# Allegro board sensor.brd
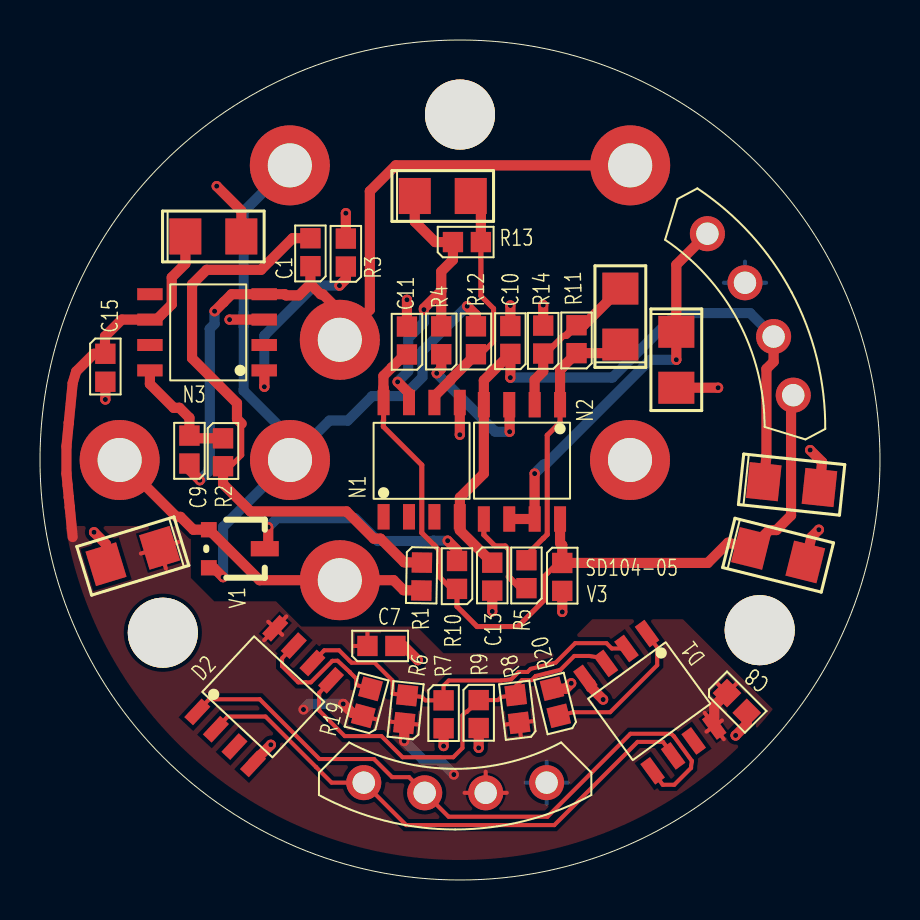
[diagram p0: board, top side]
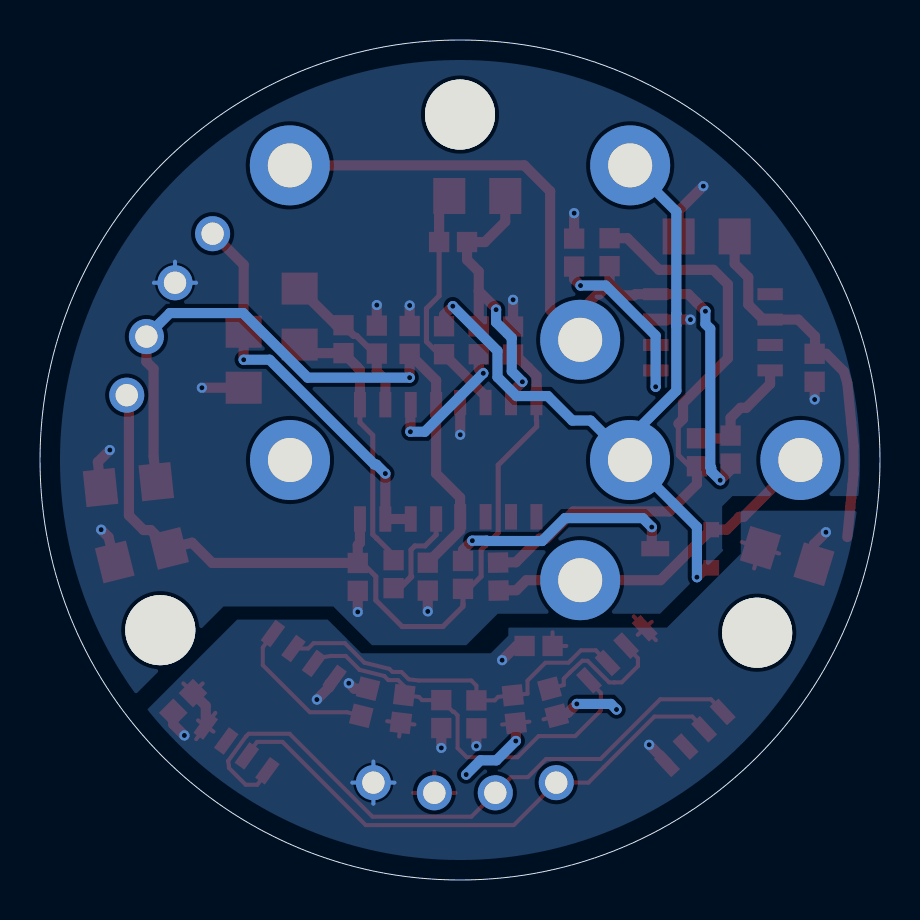
[diagram p1: board, bottom side, seen from below]

Outline 42 x 42 mm; copper layers: TOP, BOTTOM. Coordinates in mm from the lower left corner of the outline.
Outline path: circle c21,21 r21

## Placement (name value [footprint] x y rotation side)
C1  1nF  [0603]  13.52 30.69 90 top
C2  0.33uF  [C1206]  20.14 34.2 0 top
C3  10uF/25V  [C1206]  36.91 16.24 346 top
C4  10uF/25V  [C1206]  37.58 19.77 354 top
C5  0.1uF  [C1206]  29.02 28.17 90 top
C6  10uF  [C1206]  4.64 16.2 197 top
C7  0.1uF  [0603]  16.37 11.7 0 top
C8  0.1uF  [0603]  34.35 9.35 315 top
C9  10nF  [0603]  7.47 20.82 90 top
C10  0.1uF  [0603]  23.52 26.31 90 top
C11  0.1uF  [0603]  18.35 26.28 90 top
C12  0.1uF  [0603]  26.11 15.85 270 top
C13  0.1uF  [0603]  22.61 15.87 270 top
C14  10uF/25V  [C1206]  8.67 32.18 0 top
C15  0.1uF  [0603]  3.27 26.31 270 top
C16  10uF  [C1206]  31.82 26.01 270 top
D1  AT24C04  [SO8]  30.35 12.32 306 top
D2  TMP275  [SO8]  7.87 8.41 47 top
N1  OPA2277  [SO8]  17.18 18.16 90 top
N2  OPA2277  [SO8]  26 23.77 270 top
N3  LMP7721  [SO8]  11.21 25.48 180 top
NOREF  -  [unnamed]  21 38.27 0 top
NOREF#2  -  [unnamed]  35.99 12.49 0 top
NOREF#3  -  [unnamed]  6.14 12.36 0 top
R1  10k  [0603]  19.1 15.87 269 top
R2  10k  [0603]  9.15 22.09 270 top
R3  10k  [0603]  15.29 30.67 90 top
R4  10k  [0603]  20.06 26.29 90 top
R5  10k  [0603]  24.32 14.59 90 top
R6  10k  [0603]  18.21 7.85 84 top
R7  10k  [0603]  20.18 8.98 270 top
R8  10k  [0603]  23.96 7.86 97 top
R9  10k  [0603]  21.94 9 270 top
R10  1M  [0603]  20.85 14.56 90 top
R11  47k  [0603]  26.83 26.34 90 top
R12  100R  [0603]  21.8 26.29 90 top
R13  1k  [0603]  20.65 31.9 0 top
R14  4.7k  [0603]  25.16 26.32 90 top
R19  10k  [0603]  16.16 8.21 75 top
R20  10k  [0603]  25.94 8.21 104 top
TP2  7EF  [SO2_4S]  14.99 27.01 0 top
TP3  4S  [SO2_4S]  29.51 35.73 0 top
TP5  7EF  [SO2_4S]  14.99 14.99 0 top
TP6  4S  [SO2_4S]  3.98 21 0 top
TP8  7EF  [SO2_4S]  12.5 21 0 top
TP9  4S  [SO2_4S]  12.49 35.73 0 top
TP10  7EF  [SO2_4S]  29.5 21 0 top
V1  SST117  [SOT23]  8.44 17.52 270 top
X1  HEADER 4  [SIP4_CIR]  16.19 4.87 0 top
X2  HEADER 4  [SIP4_CIR]  37.66 24.24 118 top

## Library data of the parts
C1 C7-C13 C15 = 0.01uFCapacitor16V10%0402
C2-C6 C14 C16 = CT2012_0
D1 = AT24C04_1
D2 = AT24C04_2
N1 N2 = AD8072
N3 = AT24C04_3
R1-R14 R19 R20 = R1005_0
TP2 TP3 TP5 TP6 TP8-TP10 = TEST POINT_0
V1 = 2N4851_2
X1 X2 = HEADER 4

## Footprints (pads in the part's own frame, mm; a bottom-side part is the same pattern mirrored in y, then rotated)
0603
  rect 1.016x1.016 smd: 1(0,0) 2(1.397,0)
C1206
  rect 1.6x1.803 smd: 1(-1.4,0) 2(1.4,0)
SIP4_CIR
  round 1.753 hole 1.118: 1(0,0) 2(3.048,-0.508) 3(6.096,-0.508) 4(9.144,0)
SO2_4S
  round 4 hole 2.2: 1(0,0)
SO8
  rect 1.27x0.6 smd: 1(0,0) 2(0,-1.27) 3(0,-2.54) 4(0,-3.81) 5(5.715,-3.81) 6(5.715,-2.54) 7(5.715,-1.27) 8(5.715,0)
SOT23
  rect 0.762x0.787 smd: 1(0,0) 2(1.905,0)
  rect 0.762x1.397 smd: 3(0.95,2.799)
unnamed
  round 3.5 hole 3.5: (0,0)

## Nets
+3.3VD: C6.1 C7.1 C8.1 C14.1 C15.1 D1.8(VCC) D2.8(VCC) N3.6(V+) R6.1 R8.1 R19.1 X1.3
+12V: C3.1 C11.1 C12.1 N1.8(V+) N2.8(V+) R10.1 X2.1
-12V: C4.1 C10.1 C13.1 N1.4(V-) N2.4(V-) X2.2
AGND: C3.2 C4.2 C10.2 C11.2 C12.2 C13.2 C14.2 C15.2 C16.2 N1.5(IN+) N3.3(V-) R3.2 R14.2 X2.3
DGND: C6.2 C7.2 C8.2 D1.4(GND) D2.4(GND) R7.2 R9.2 R20.2 X1.4
A1: D1.2(A1) D2.6(A1) R6.2 R7.1
A2: D1.3(A2) D2.5(A2) R8.2 R9.1
CE: C1.1 C9.1 N3.4(OUT) TP2.1 TP3.1
IN+: N3.1(IN+) R3.1
IN-: C9.2 N3.8(IN-) R2.1
NC1: N3.2(NC1)
RE: R1.2 TP5.1 TP6.1 V1.1(D)
SCL: D1.6(SCL) D2.2(SCL) X1.1
SDA: D1.5(SDA) D2.1(SDA) X1.2
SO2: C16.1 N2.6(IN-) N2.7(OUT) X2.4
WE: R12.2 TP8.1 TP9.1 V1.2(S)
N16750688: C2.2 N1.6(IN-) R12.1 R13.2
N16750692: N2.3(IN+) R4.1
N16750696: N2.5(IN+) R5.1
N16750700: C5.1 N2.1(OUT) R5.2 R11.1
N16750707: C2.1 N1.7(OUT) R4.2 R13.1
N16750928: C5.2 N2.2(IN-) R11.2 R14.1
N16752562: C1.2 R1.1 R2.2
N16752936: R10.2 V1.3(G)
N16754242: D2.7(A0) R19.2
N16756486: D1.1(A0) R20.1

Pads without a net: D1 7; D2 3; N1 1 2 3; N3 5 7; TP10 1

## Via types
v1: diameter 0.508, hole 0.254, TOP to BOTTOM, 40 vias

## Routing (per net, layer and track width the routed paths; a pad name or vN(x,y) marks a point on that pad's centre or on a via; arc(x,y) is an arc through that point)
+3.3VD: length 47.6
  TOP w0.203: C6.1 6.91,16.9 ; C6.1 6.29,15.58 ; C6.1 5.04,16.32 ; D2.8 12.32,13.18 ; D2.8 12.11,12.26 ; D2.8 11.21,11.99 ; D2.8 11.41,12.91 ; 16.82,8.03 R19.1 15.5,8.39 ; 33.23,8.36 D1.8 ; D1.8 34.19,7.04 ; D1.8 34.1,7.98 ; D1.8 33.33,7.42 ; 17.53,7.92 R6.1 ; R6.1 18.14,7.16 ; R6.1 18.89,7.77 ; X1.3 23.34,4.36 ; X1.3 21.23,4.36 ; X1.3 22.28,5.41 ; R8.1 24.64,7.94 ; R8.1 23.28,7.77 ; R8.1 24.04,7.18 ; 34.83,9.83 C8.1 33.86,9.83 ; 16.37,12.39 C7.1 15.69,11.7
  TOP w0.508: R6.1 18.21,6.95 v1(18.21,6.95) ; v1(15.16,8.8) 15.6,8.36 R19.1 ; D1.8 33.71,8.71 C8.1 ; 1.63,17.15 1.5,18.54 1.5,18.63 1.49,18.64 1.38,19.75 1.32,20.31 1.32,21.69 1.44,22.87 1.63,24.85 1.81,25.43 2.69,26.31 C15.1 3.25,26.33 3.25,27.18 4.09,28.02 N3.6 5.83,28.02 6.59,28.78 6.59,30.13 7.27,30.81 C14.1
  BOTTOM w0.508: v1(15.16,8.8) 13.45,8.8 v1(13.17,8.52) ; v1(18.21,6.95) 19.18,5.99 19.98,5.99 v1(20.69,5.27)
+12V: length 43.4
  TOP w0.254: N1.8 17.18,22.99 17.17,22.97 17.17,22.67 19.09,20.75 19.09,17.36 19.7,16.74 19.71,16.74 19.75,16.7 19.94,16.5 19.94,15.18 20.57,14.56 R10.1 20.85,13.79 20.85,13.79 20.85,13.68 21.85,12.67 23.89,12.67 25.21,13.99 25.21,15.18 25.89,15.85 C12.1
  TOP w0.508: C11.1 18.24,26.28 17.59,25.62 17.17,25.2 17.17,24.61 17.18,24.6 N1.8 ; N2.8 26,16.85 26.11,16.74 C12.1 33.39,15.85 34.4,16.86 C3.1 36.47,17.5 36.82,17.5 37.55,18.23 37.55,24.13 X2.1
-12V: length 35.7
  TOP w0.508: C13.1 20.99,17.49 N1.4 21,18.17 21,19.12 22.19,20.32 N2.4 22.19,24.98 C10.1 v1(23.52,25.12) ; C4.1 36.32,21.19 36.32,25.55 36.68,25.91 X2.2
  BOTTOM w0.508: X2.2 35.5,28.35 31.84,28.35 28.62,25.12 v1(23.52,25.12)
AGND: length 23.2
  TOP w0.508: C10.2 v1(23.52,28.73) ; N1.5 v1(20.99,22.26) ; R3.2 v1(15.29,33.34) ; v1(8.83,34.69) 10.07,33.46 C14.2 ; C16.2 v1(33.91,24.61) ; C15.2 v1(3.27,24.02) ; C4.2 39.11,20.9 v1(38.51,21.5) ; N3.3 v1(9.48,28.02) ; C11.2 v1(18.35,29.01) ; C13.2 v1(22.61,13.43) ; v1(38.94,17.52) 38.57,17.15 C3.2 ; C12.2 v1(26.11,13.4) ; R14.2 v1(25.16,28.75)
  BOTTOM w0.203: X2.3 36.3,29.86 ; X2.3 35.25,30.92 ; X2.3 34.2,29.86
DGND: length 14.5
  TOP w0.508: C8.2 35.34,7.78 v1(34.78,7.23) ; R20.2 26.29,9.57 v1(26.56,9.84) ; v1(18.89,10.99) 18.18,11.7 C7.2 ; v1(11.54,6.76) 10.65,5.87 D2.4 ; R7.2 v1(20.18,6.7) ; C6.2 3.3,16.79 v1(2.7,17.39) ; R9.2 v1(21.94,6.61) ; D1.4 27.53,9.82 27.53,9.65 v1(28.16,9.02)
  BOTTOM w0.203: X1.4 25.33,5.92 ; X1.4 25.33,3.81 ; X1.4 24.28,4.87 ; X1.4 26.39,4.87
A1: length 19
  TOP w0.203: D1.2 28.59,11.58 28.32,11.84 26.76,11.84 25.78,10.87 24.53,10.56 24.38,10.4 23.93,10.4 23.56,10.04 23.06,9.97 20.43,9.97 20.18,9.72 R7.1 19.27,8.98 19.09,9.16 R6.2 17.63,9.31 17.63,9.97 16.73,10.86 15.58,10.86 15.47,10.97 14.95,11.48 14.21,11.48 D2.6
A2: length 20.4
  TOP w0.203: D1.3 28.1,11.1 27.46,11.2 26.71,11.2 26.02,10.51 24.79,10.2 24.79,10.2 24.58,10 24.1,10 23.79,9.69 R8.2 23.06,9.15 22.9,9 R9.1 21.35,8.41 21.3,8.41 21.12,8.23 21.12,6.6 20.66,6.14 18.13,6.14 17.07,7.19 15.24,7.19 13.96,8.47 13.96,9.35 D2.5
CE: length 41.2
  TOP w0.508: C9.1 7.47,20.51 v1(7.99,19.99) ; 13.52,29.8 14.04,29.28 14.14,29.28 14.99,28.44 TP2.1 16.49,28.51 16.49,34.44 17.78,35.73 TP3.1 ; 13.52,29.8 12.95,29.23 12.29,29.23 12.24,29.29 N3.4 9.58,29.29 9.18,28.89 v1(8.73,28.44) ; 13.52,29.8 C1.1
  BOTTOM w0.508: v1(8.73,28.44) 8.73,27.8 8.49,27.56 8.49,20.65 8.44,20.6 8.44,20.44 v1(7.99,19.99)
IN+: length 9.3
  TOP w0.508: v1(14.97,29.72) 15.29,30.04 R3.1 ; v1(11.22,24.66) 11.22,25.47 N3.1
  BOTTOM w0.508: v1(11.22,24.66) 11.22,27.22 13.72,29.72 v1(14.97,29.72)
IN-: length 6
  TOP w0.508: R2.1 7.61,22.09 C9.2 7.47,23.11 6.97,23.61 6.68,23.61 5.5,24.8 N3.8
RE: length 17.8
  TOP w0.508: R1.2 18.18,14.49 17.68,14.99 TP5.1 10.98,14.99 8.45,17.52 V1.1 7.67,17.52 7.02,18.16 6.83,18.16 TP6.1
SCL: length 27.5
  TOP w0.203: D2.2 9.38,8.17 11.28,8.17 13.81,5.64 14.58,4.87 X1.1 18.31,2.74 25.71,2.74 29.87,6.9 31.15,6.9 D1.6
SDA: length 32.8
  TOP w0.203: D2.1 8.45,9.04 10.99,9.04 13.97,6.05 16.7,6.05 17.61,5.14 18.45,5.14 X1.2 20.43,3.16 25.37,3.16 29.52,7.31 31.56,7.31 31.7,7.18 31.7,7.18 32.59,5.95 32.59,5.95 32.55,5.7 32.55,5.6 31.71,4.76 31.14,4.76 D1.5
SO2: length 19.9
  TOP w0.508: X2.4 31.82,30.76 C16.1 v1(31.82,26.01) ; v1(24.73,20.32) N2.7 N2.6
  BOTTOM w0.508: v1(24.73,20.32) 25.18,20.77 25.27,20.77 30.52,26.01 v1(31.82,26.01)
WE: length 38.8
  TOP w0.508: v1(21.36,28.69) 21.8,28.26 R12.2 ; V1.2 8.68,15.61 v1(9.15,15.14)
  BOTTOM w0.508: TP8.1 9.15,17.65 v1(9.15,15.14) ; TP8.1 12.5,22.15 10.18,24.46 10.18,27.72 10.19,27.73 10.19,28.31 10.18,28.32 10.18,33.42 TP9.1 ; TP8.1 14.47,22.97 15.38,22.97 16.61,24.2 18.18,24.2 19.12,25.15 19.12,26.45 v1(21.36,28.69)
N16750688: length 12.2
  TOP w0.254: R13.2 22.04,29.21 22.68,28.57 22.68,26.92 22.05,26.29 R12.1
  TOP w0.508: C2.2 22.04,33.69 R13.2 ; N1.6 19.72,24.19 20.53,25 20.53,25.02 R12.1
N16750692: length 7.3
  TOP w0.508: v1(19.84,25.34) 20.06,25.56 R4.1 ; N2.3 23.48,23.75 v1(23.48,22.41)
  BOTTOM w0.508: v1(23.48,22.41) 22.76,22.41 v1(19.84,25.34)
N16750696: length 4.8
  TOP w0.254: 23.43,15.17 23.45,15.18 23.45,16.51 23.26,16.7 22.75,16.7 22.19,17.26 N2.5
  TOP w0.305: R5.1 24.01,14.59 23.43,15.17
N16750700: length 13.8
  TOP w0.254: N2.1 26,22.88 25.36,22.24 25.36,17.28 25.17,17.08 25.16,17.08 24.32,16.25 R5.2
  TOP w0.508: C5.1 28.59,26.34 R11.1 26.13,25.64 26.13,25.63 26,25.5 N2.1
N16750707: length 14.8
  TOP w0.508: 20.06,29.45 20.06,30.42 20.65,31.01 R13.1 19.76,31.9 18.74,32.92 C2.1 ; 20.06,29.45 19.2,28.58 v1(19.2,28.52) ; 20.06,29.45 R4.2 ; N1.7 18.45,24.34 v1(17.88,24.91)
  BOTTOM w0.508: v1(17.88,24.91) 18.41,25.44 18.41,27.1 19.2,27.88 v1(19.2,28.52)
N16750928: length 7.9
  TOP w0.305: 25.29,26.32 26.17,27.21 26.29,27.21 26.33,27.24
  TOP w0.381: 26.33,27.24 R11.2 ; R14.1 25.29,26.32
  TOP w0.508: N2.2 24.73,25.01 25.16,25.43 R14.1 ; C5.2 27.19,27.74 R11.2
N16752562: length 30.1
  TOP w0.254: R2.2 9.53,20.69 10.08,21.24 10.08,22.82
  TOP w0.508: R1.1 18.21,15.89 17.02,17.07 16.69,17.07 15.33,18.43 10.52,18.43 9.15,19.8 R2.2 ; 10.08,22.82 9.85,23.05 9.85,23.84 7.6,26.09 7.6,29.78 8.33,30.51 11.05,30.51 12.63,32.09 C1.2
N16752936: length 12
  TOP w0.508: v1(20.38,16.97) 20.85,16.5 R10.2 ; v1(11.41,17.64) 11.41,16.74 V1.3
  BOTTOM w0.508: v1(11.41,17.64) 11.86,18.09 15.75,18.09 16.89,16.95 19.66,16.95 19.67,16.97 v1(20.38,16.97)
N16754242: length 7.2
  TOP w0.203: D2.7 12.1,11.09 12.1,10.69 12.91,9.88 13.28,9.88 13.29,9.87 13.54,9.88 14.62,10.96 14.63,10.96 14.88,10.96 15.5,10.38 15.5,10.38 15.81,10.07 15.81,9.75 R19.2
N16756486: length 7.7
  TOP w0.203: D1.1 30.86,11.62 30.86,10.74 28.51,8.39 26.65,8.39 R20.1

## Copper pours and planes (outline as drawn; the poured copper is in the pictures)
+3.3VD on TOP: 36.64,8.54 15.99,1.64 1.27,17.7 6.9,17.7 7.55,17.06 7.55,15.1 8.72,13.93 11.8,13.93 13.06,12.67 18.84,12.67 20.17,11.34 25.91,11.34 27.61,13.04 32.14,13.04
AGND on BOTTOM: 1.08,19.2 26.29,40.29 37.21,9.29 32.82,13.68 27.34,13.68 25.4,11.74 20.69,11.74 19.11,13.31 11,13.31 7.82,16.49 7.89,16.56 7.89,18.69 7.38,19.2
DGND on BOTTOM: 36.64,8.53 15.61,1.74 1.16,18.47 6.96,18.47 6.96,16.31 10.65,12.62 18.58,12.62 18.58,12.22 19.46,11.34 25.93,11.34 27.61,13.02 32.14,13.02

## Text on the board
Ref Des/Silkscreen Top: SD104-05 | V3
NCLEGEND-1-2: FIGURE | SIZE | 10.0 | 44.0 | 86.614 | 137.795 | DRILL CHART: TOP to BOTTOM | ALL UNITS ARE IN MILS | PLATED | QTY | 40 | 8 | 7 | 3
